# Altium PCB PCB2.PcbDoc
Units mm, origin at the board's own origin, x right, y up, seen from the top; angles counter-clockwise.
Board outline 100.62 x 85.5 mm, 2 copper layers (Top Layer, Bottom Layer); 53 components, 35 nets, 169 pads, 12 vias.
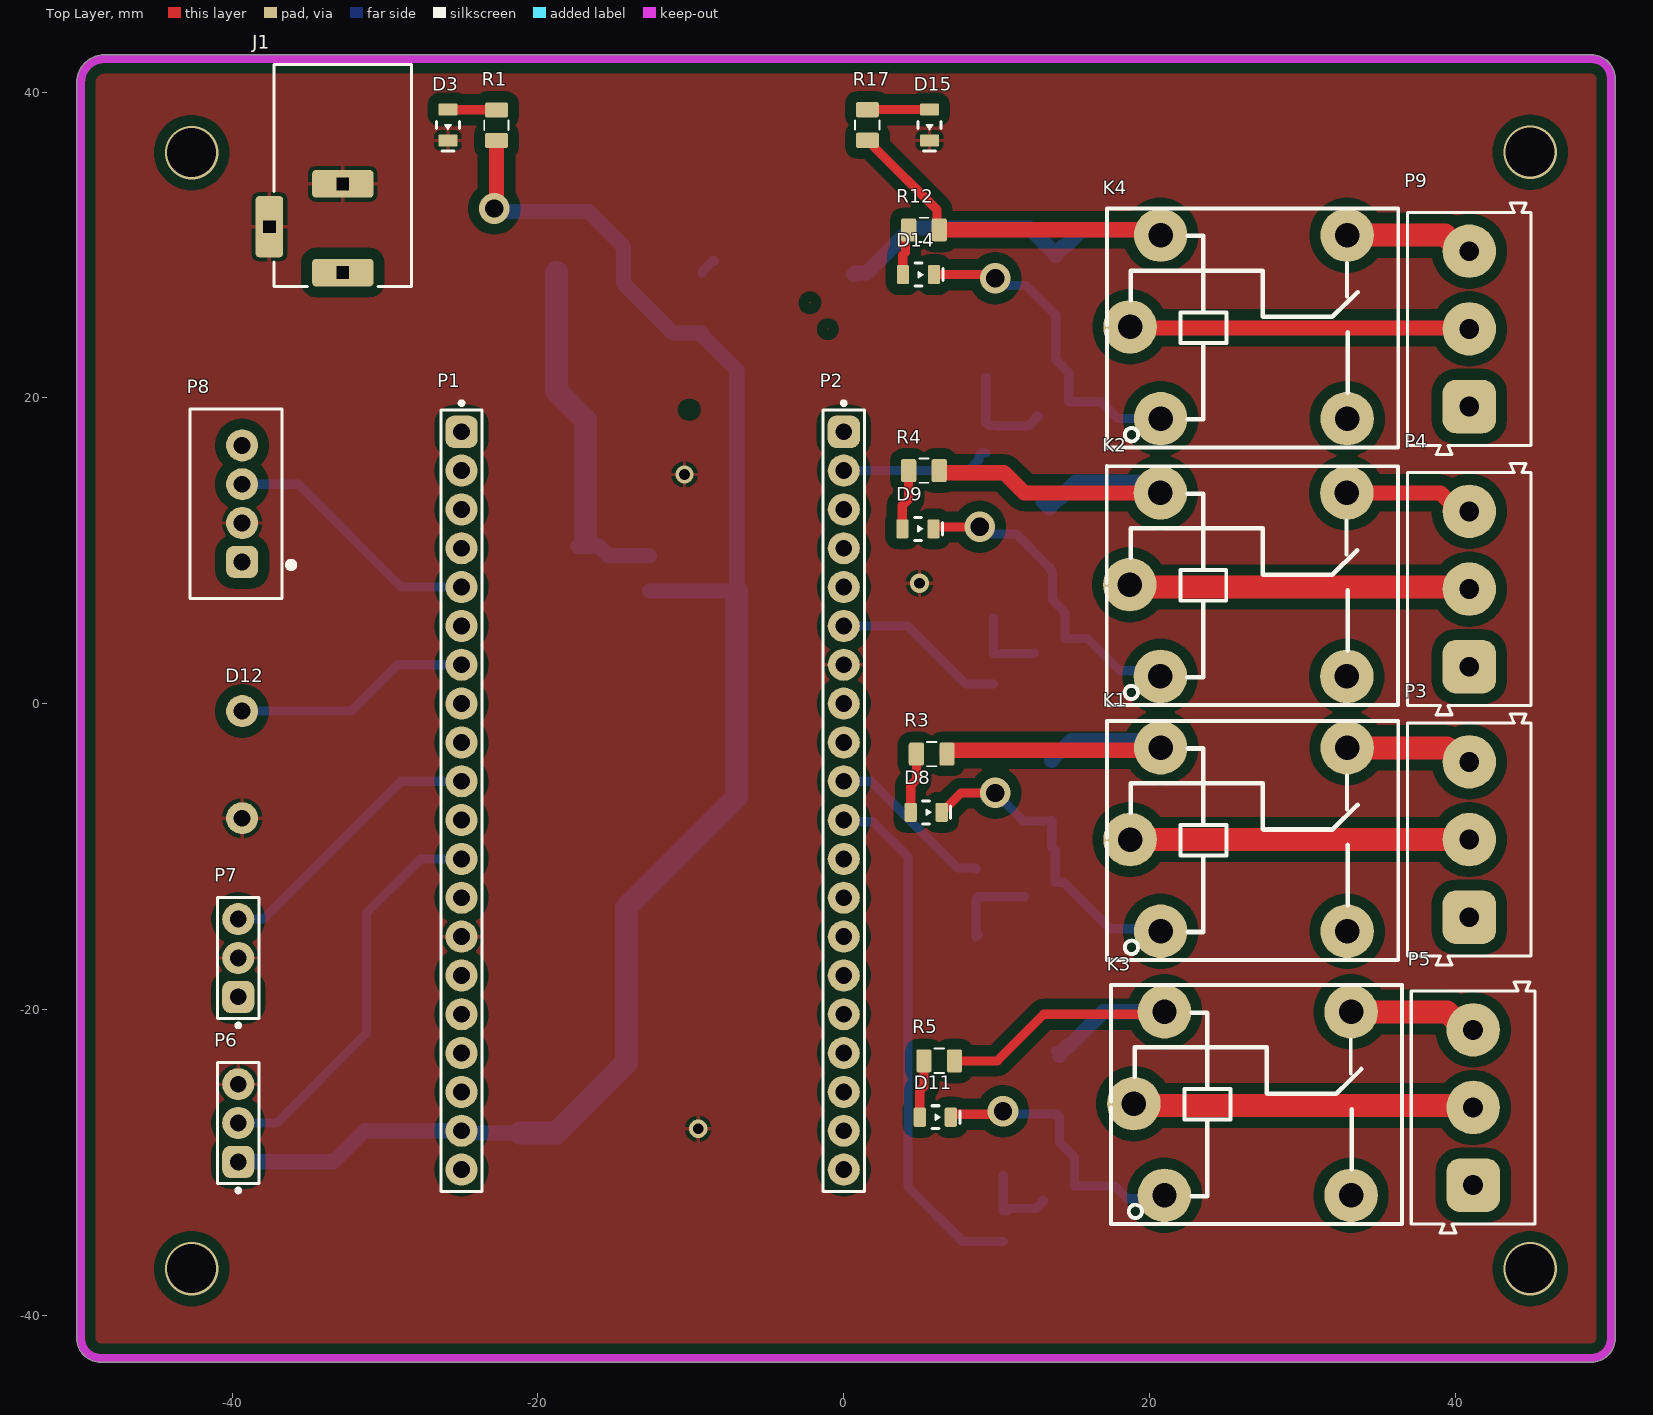
[diagram p0: Top Layer view]
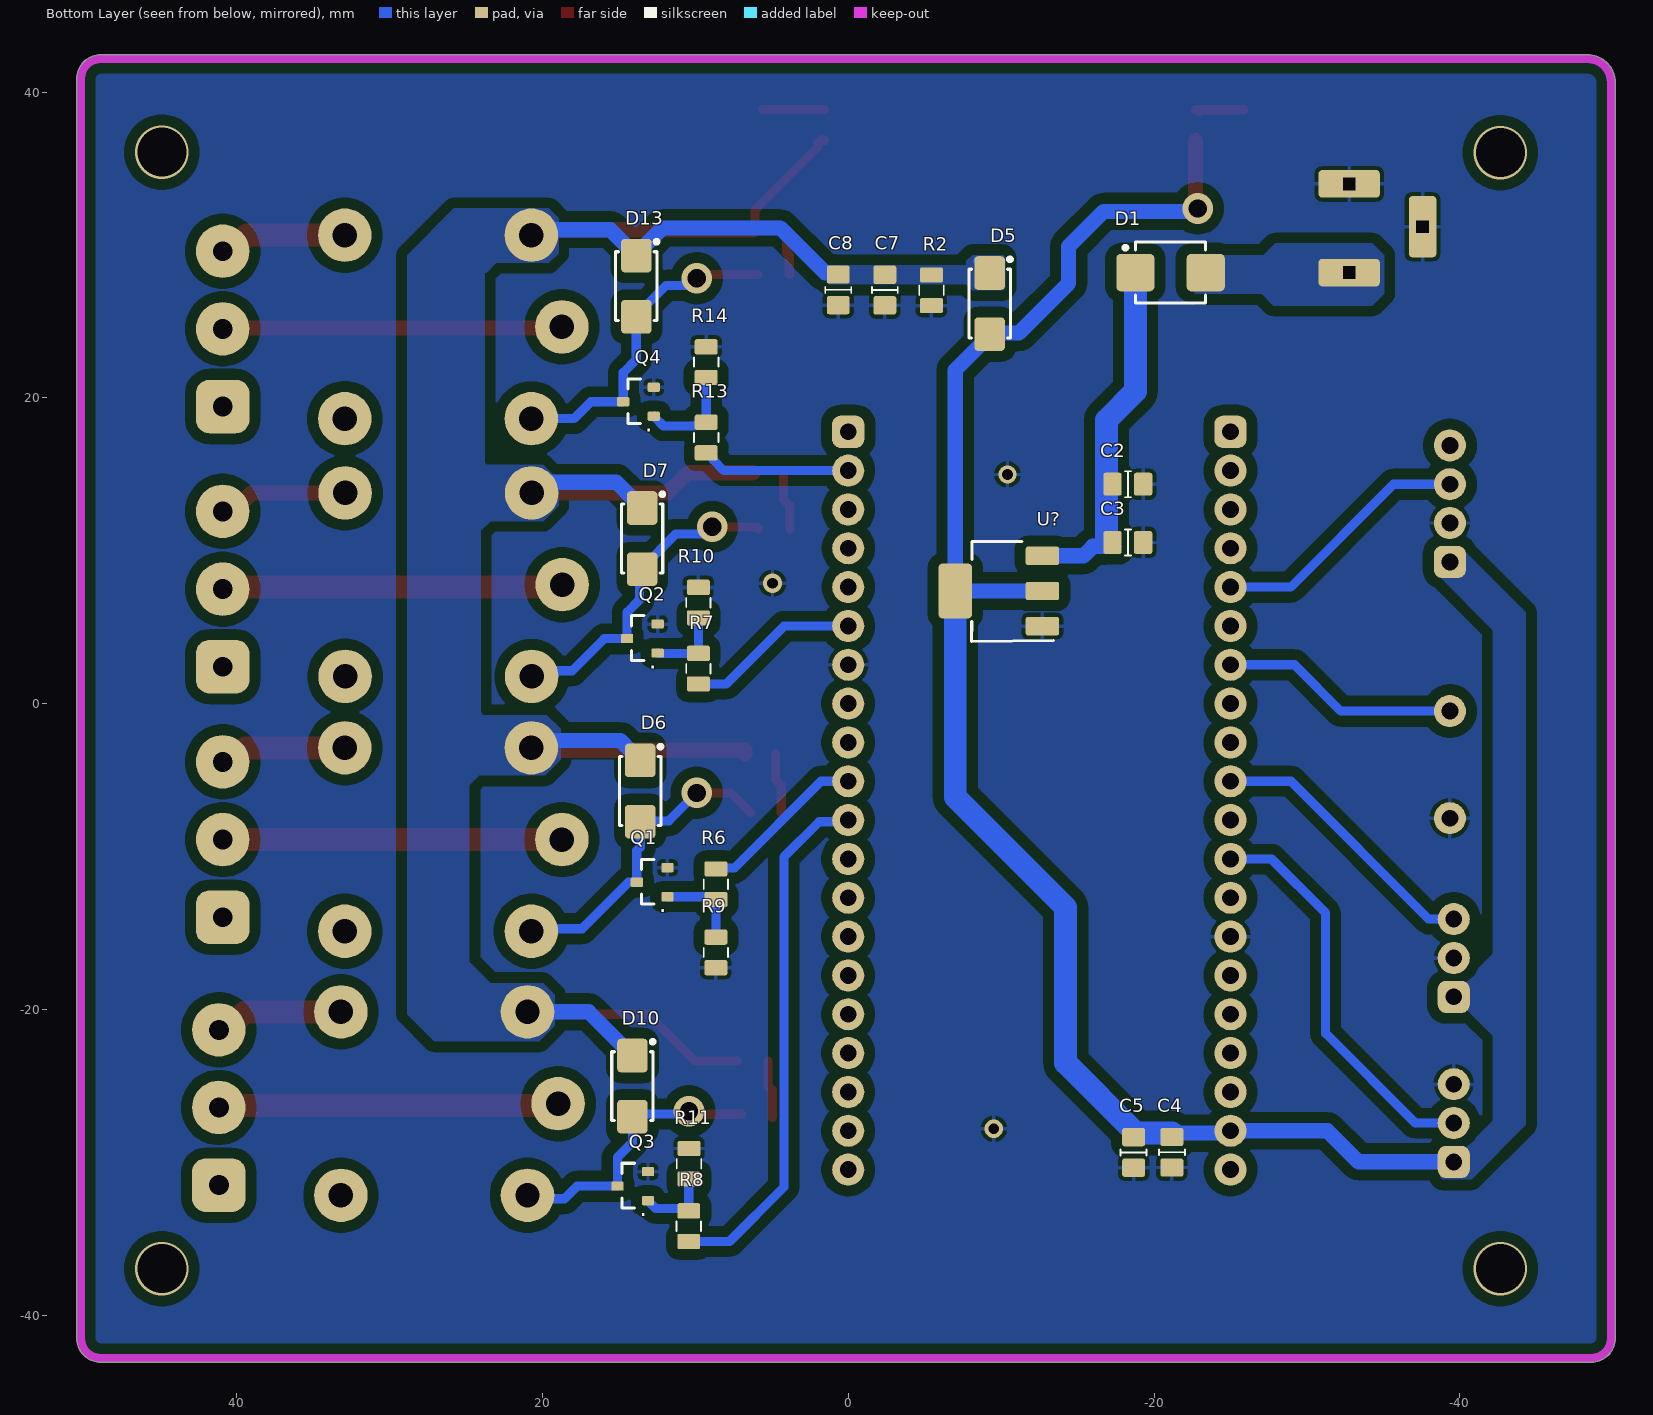
[diagram p1: Bottom Layer view, seen from below]
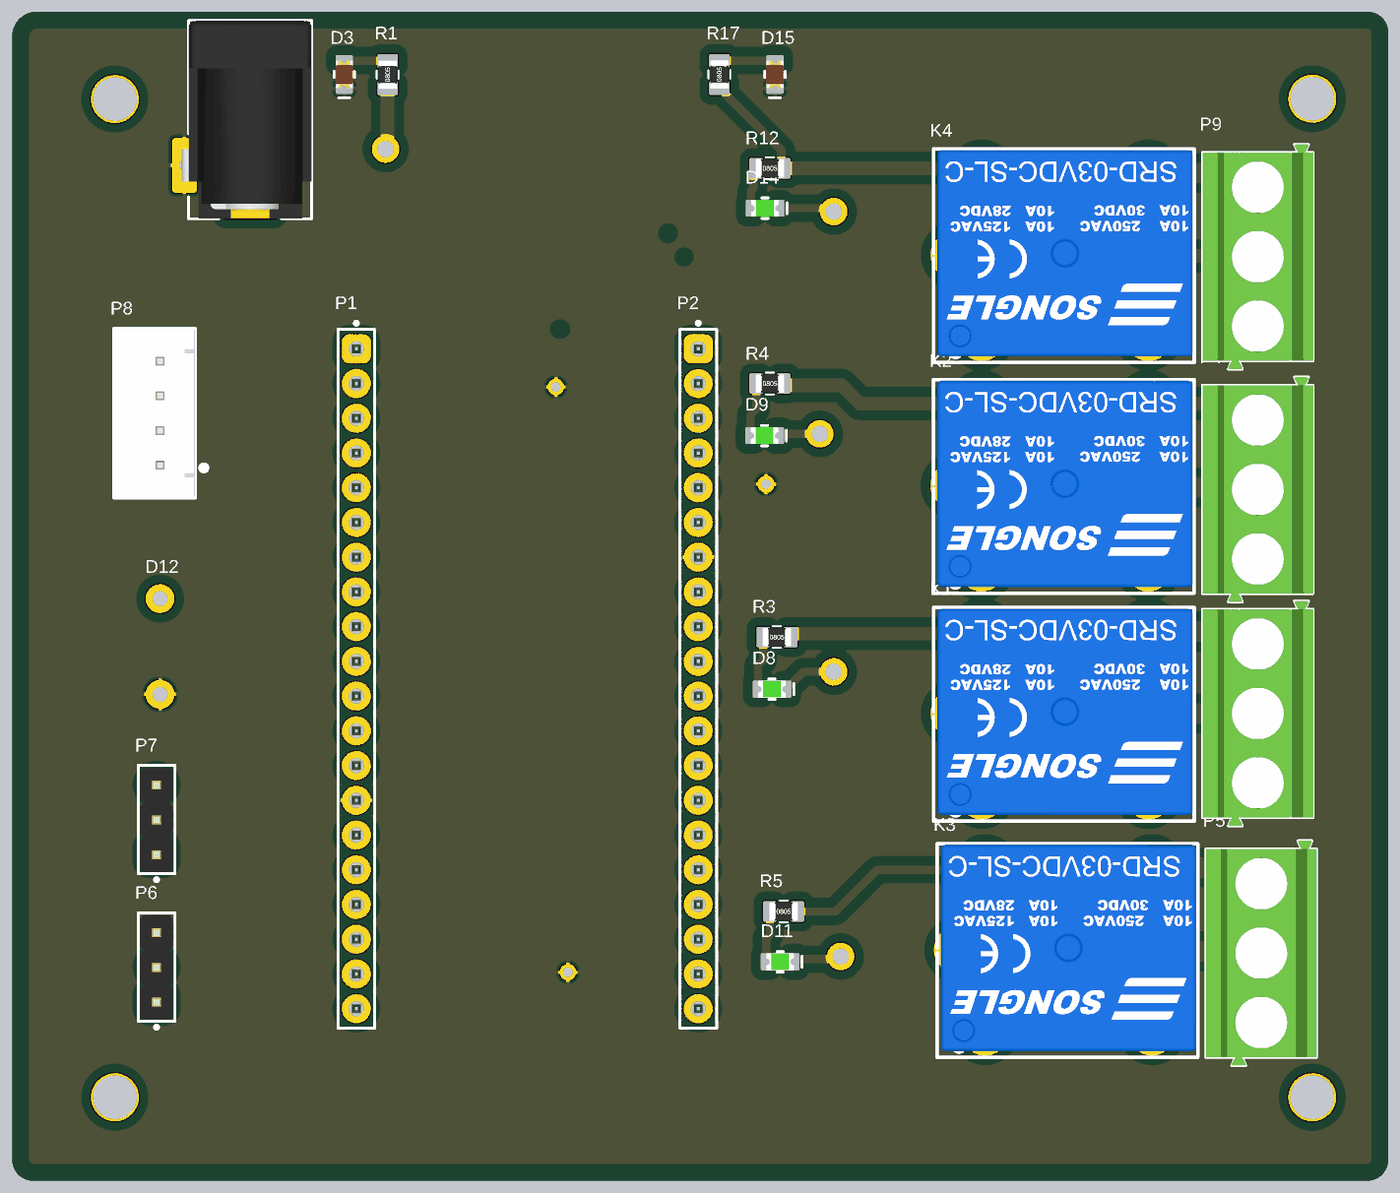
[diagram p2: 3D render of the assembled board from above, using the file's embedded part models]
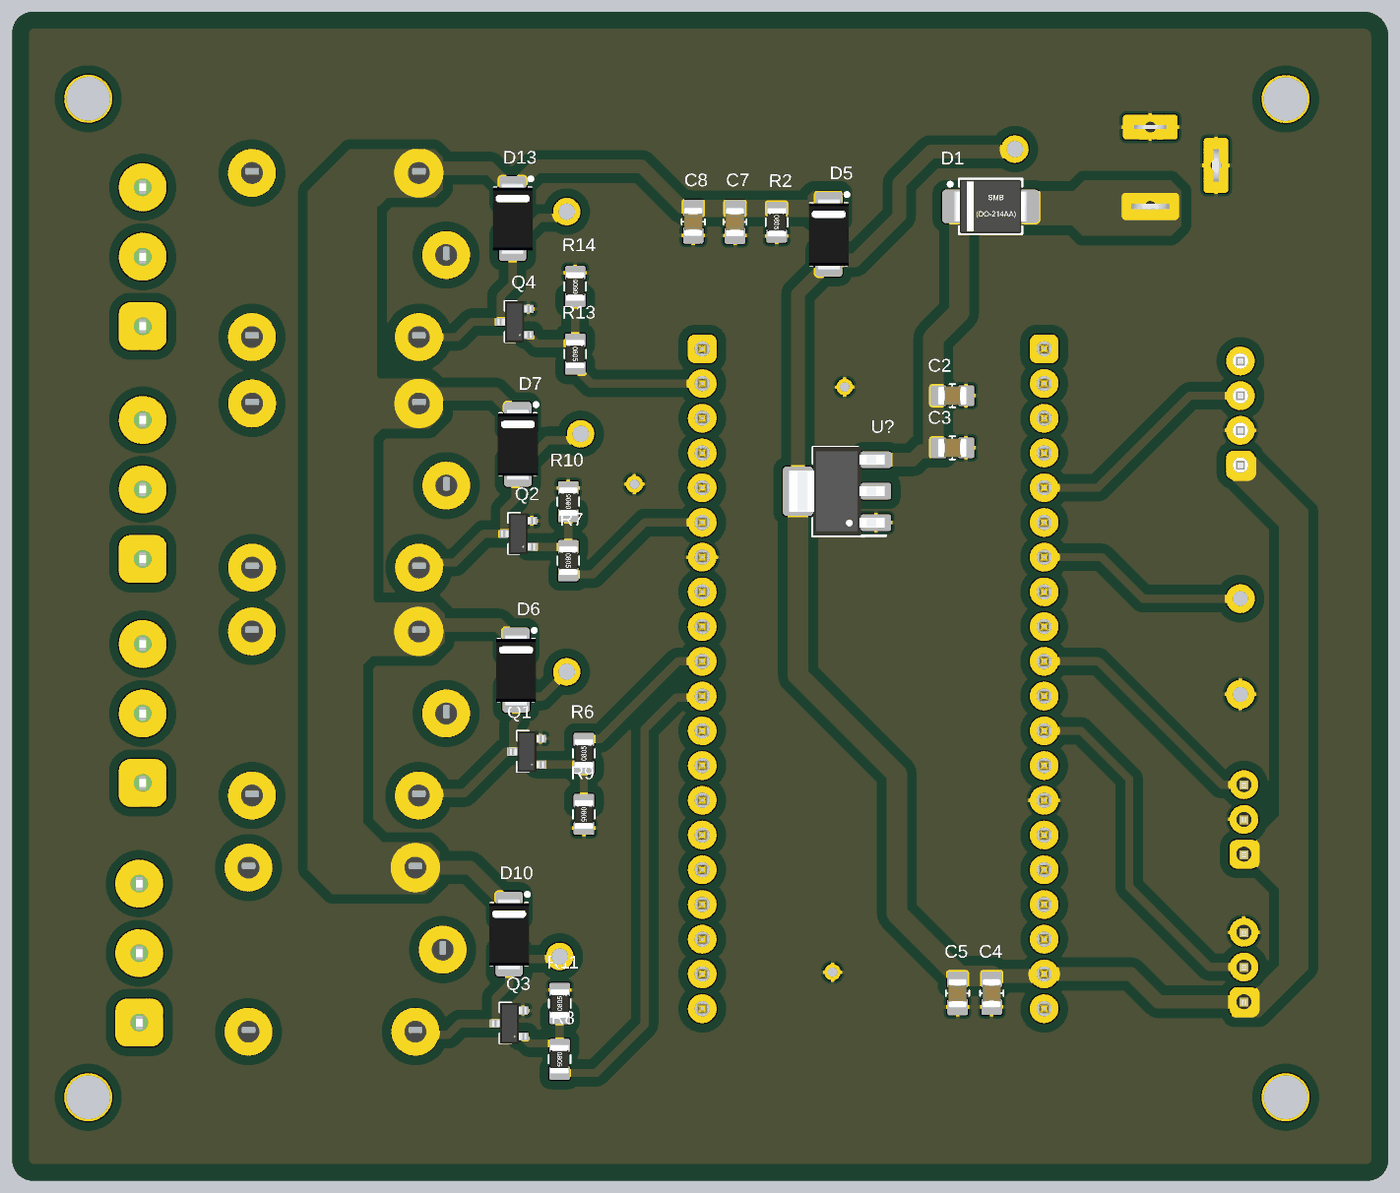
[diagram p3: 3D render of the assembled board from below, using the file's embedded part models]

## Layer stack, top to bottom
Top Solder: solder mask 0.0102, Solder Resist, Dk 3.5
Top Layer: signal copper 0.0356
Dielectric 1: dielectric 0.32, FR-4, Dk 4.8
Bottom Layer: signal copper 0.0356
Bottom Solder: solder mask 0.0102, Solder Resist, Dk 3.5

## Board outline
-50.162,-41.529 ccw(c-48.622,-41.529) -48.624,-43.069 -48.622,-43.069 48.406,-43.069 48.914,-43.069 ccw(c48.914,-41.529) 50.454,-41.529 50.454,-41.465 50.454,40.899 50.454,40.903 ccw(c48.914,40.894) 48.92,42.434 48.919,42.434 -48.368,42.434 ccw(c-48.368,40.64) -50.162,40.64

## Design rules (kind name [scope] priority, off if disabled: settings)
Clearance [All] p1: gap=0.7 ignorepadtopadclearanceinfootprint=FALSE
PolygonConnect [All] p1: connectstyle=Relief reliefconductorwidth=0.254 reliefentries=4 polygonreliefangle="90 Angle" airgapwidth=0.254
RoutingVias [All] p1: holewidth=0.711 width=1.27 viastyle="Through Hole" minholewidth=0.711 minwidth=1.27 maxholewidth=0.711 maxwidth=1.27
SolderMaskExpansion [All] p1: expansion=0.102 istentingtop=FALSE
SupplyNets "Schematic Supply Nets_2" [InNet('+5V')] p1: voltage=0.000
SupplyNets "Schematic Supply Nets_1" [InNet('+5V_A')] p2: voltage=0.000
SupplyNets "Schematic Supply Nets" [InNet('GND')] p3: voltage=0.000
Width [All] p1: maxlimit=1.5 minlimit=0.6 preferedwidth=1
30 further rules are at their usual default settings.

## Components (designator, comment, footprint, x,y, rotation, side; value= is the part's Value field where it differs from the comment)
C2 "100nF" CAP_0805 -18.288,14.351 r0 bottom
C3 "100nF" CAP_0805 -18.288,10.541 r0 bottom
C4 "100nF" CAP_0805 -21.168,-29.345 r90 bottom
C5 "100nF" CAP_0805 -18.669,-29.353 r90 bottom
C7 "100nF" CAP_0805 -2.394,27.051 r90 bottom
C8 "1uF" CAP_0805 0.654,27.067 r90 bottom
D1 "SS36" DIO_SMB -21.082,28.194 r180 bottom
D3 "LED RED" LED_RED_V0805 -25.889,37.846 r270 top
D5 "SS34" DIO_SMA -9.252,26.162 r270 bottom
D6 "SS34" DIO_SMA 13.608,-5.715 r270 bottom
D7 "SS34" DIO_SMA 13.481,10.795 r270 bottom
D8 "GREEN LED" LED_GREEN_V0805 5.392,-7.112 r0 top
D9 "GREEN LED" LED_GREEN_V0805 4.852,11.43 r0 top
D10 "SS34" DIO_SMA 14.116,-25.019 r270 bottom
D11 "GREEN LED" LED_GREEN_V0805 5.988,-27.051 r0 top
D12 "Buzzer" PCBComponent_1 -39.351,-7.493 r90 top
D13 "SS34" DIO_SMA 13.862,27.305 r270 bottom
D14 "GREEN LED" LED_GREEN_V0805 4.884,28.061 r0 top
D15 "LED RED" LED_RED_V0805 5.607,37.846 r270 top
J1 "JACK-Power-DC5.5mm" CON-JACK-PWR-DC550 -32.766,34.544 r180 top
K1 "SRD-03VDC-SL-C" RLY 26.435,-8.89 r0 top
K2 "SRD-03VDC-SL-C" RLY 26.423,7.778 r0 top
K3 "SRD-03VDC-SL-C" RLY 26.689,-26.162 r0 top
K4 "SRD-03VDC-SL-C" RLY 26.435,24.638 r0 top
P1 "ESP32" 61302011121 -25,-6.35 r270 top locked
P2 "ESP32" 61302011121 0,-6.35 r270 top locked
P3 "Terminal Block" CON_03_508_STBRC 40.913,-8.89 r90 top
P4 "Terminal Block" CON_03_508_STBRC 40.913,7.493 r90 top
P5 "Terminal Block" CON_03_508_STBRC 41.167,-26.416 r90 top
P6 "DHT11" "CON -PHD-03254-VSM" -39.605,-27.432 r90 top
P7 "Flame Sensor" "CON -PHD-03254-VSM" -39.605,-16.637 r90 top
P8 "MQ-2" CON_04_254_VSMBHD -39.351,13.071 r90 top
P9 "Terminal Block" CON_03_508_STBRC 40.913,24.511 r90 top
Q1 "BC846x" "BJT_ BC846x" 12.827,-11.684 r0 bottom
Q2 "BC846x" "BJT_ BC846x" 13.465,4.252 r0 bottom
Q3 "BC846x" "BJT_ BC846x" 14.1,-31.562 r0 bottom
Q4 "BC846x" "BJT_ BC846x" 13.719,19.746 r0 bottom
R1 "220" RES_0805 -22.714,37.83 r90 top
R2 "1M" RES_0805 -5.442,27.035 r270 bottom
R3 "220" RES_0805 5.75,-3.302 r0 top
R4 "220" RES_0805 5.242,15.24 r0 top
R5 "220" RES_0805 6.242,-23.368 r0 top
R6 "1k" RES_0805 8.655,-11.811 r90 bottom
R7 "1k" RES_0805 9.798,2.286 r270 bottom
R8 "1k" RES_0805 10.433,-34.179 r270 bottom
R9 "10K" RES_0805 8.655,-16.272 r270 bottom
R10 "10K" RES_0805 9.798,6.604 r90 bottom
R11 "10K" RES_0805 10.414,-30.099 r90 bottom
R12 "220" RES_0805 5.242,30.982 r0 top
R13 "1k" RES_0805 9.29,17.399 r270 bottom
R14 "10K" RES_0805 9.29,22.336 r90 bottom
R17 "220" RES_0805 1.543,37.846 r90 top
U? "?" PWR_LD1117_SOT223 -9.85,7.366 r0 bottom

## Footprints (in the part's own frame and the unit in brackets; to place one, negate y for a bottom-side part, rotate by r counter-clockwise, add the part's x,y. Pads: shape width x height; smd on the part's side, far side on the other; paste and mask are expansions set on the pad)
61302011121 [mm] "Pin Header, pitch 2.54 mm, THT, Vertical, single row, 20p"
  rrect50% 2.1x2.1 hole 1.1: 1(-24.13,0)
  round 2.1 hole 1.1: 2(-21.59,0) 3(-19.05,0) 4(-16.51,0) 5(-13.97,0) 6(-11.43,0) 7(-8.89,0) 8(-6.35,0) 9(-3.81,0) 10(-1.27,0) 11(1.27,0) 12(3.81,0) 13(6.35,0) 14(8.89,0) 15(11.43,0) 16(13.97,0) 17(16.51,0) 18(19.05,0) 19(21.59,0) 20(24.13,0)
  silkscreen extent -26.12,-1.35 25.55,1.35, body extent -25.4,-1.27 25.4,1.27, height 8.57
"BJT_ BC846x" [mm]
  rrect25% 0.8x0.6 smd mask+0.05: 1(-1,0.95) 2(-1,-0.95) 3(1,0)
  silkscreen extent -0.11,-1.5 0.7,1.43, body extent -1.24,-1.5 1.24,1.5, height 1.09
CAP_0805 [mm]
  rrect25% 1.2x1.5 smd: 1(-1,0) 2(1,0)
  silkscreen extent -0.2,-0.85 0.2,0.85, body extent -1.05,-0.67 1.05,0.67, height 0.95
"CON -PHD-03254-VSM" [mm]
  rrect50% 2.1x2.1 hole 1.1: 1(-2.54,0)
  round 2.1 hole 1.1: 2(0,0) 3(2.54,0)
  silkscreen extent -4.53,-1.35 3.96,1.35, body extent -3.85,-1.19 3.77,1.21, height 8.36
CON-JACK-PWR-DC550 [mm]
  rrect25% 4x1.8 hole 0.8 square: 1(0,6.35) 2(0,0.55)
  rrect25% 1.8x4 hole 0.8 square: 3(4.8,3.35)
  silkscreen extent -4.5,-7.25 4.5,7.25, body extent -4.5,-7.25 5,7.25, height 10.75
CON_03_508_STBRC [mm]
  rrect50% 3.5x3.5 hole 1.3: 1(-5.08,0)
  round 3.5 hole 1.3: 2(0,0) 3(5.08,0)
  silkscreen extent -8.22,-4.05 8.22,4.05, body extent -8.22,-4.05 8.22,4.05, height 10.1
CON_04_254_VSMBHD [mm]
  rrect50% 2.1x2.1 hole 1.1: 1(-3.8,0)
  round 2.1 hole 1.1: 2(-1.26,0) 3(1.28,0) 4(3.82,0)
  silkscreen extent -6.2,-3.4 6.2,3.4, body extent -6.15,-2.49 6.15,3.35, height 7.21
DIO_SMA [mm] "Molded Diode, 2-Leads, Body 4.25x2.50mm, IPC Medium Density"
  rrect25% 2.2x2 smd: A(2,0) C(-2,0)
  silkscreen extent -3.02,-1.35 2.25,1.45, body extent -2.61,-1.46 2.67,1.46, height 2.41
DIO_SMB [mm] "Molded Diode, 2-Leads, Body 4.31x3.62mm, IPC Medium Density"
  rrect25% 2.5x2.45 smd: A(2.3,0) C(-2.3,0)
  silkscreen extent -3.08,-2 2.3,2, body extent -2.75,-1.95 2.75,1.95, height 2.45
LED_GREEN_V0805 [mm]
  rrect25% 0.8x1.25 smd paste+0 mask+0: A(-1.016,0) C(1.016,0)
  silkscreen extent -0.23,-0.75 1.6,0.75, body extent -1.01,-0.63 1.01,0.63, height 0.8
LED_RED_V0805 [mm]
  rrect25% 0.8x1.25 smd paste+0 mask+0: A(-1.016,0) C(1.016,0)
  silkscreen extent -0.22,-0.75 1.7,0.75, body extent -1.3,-0.85 1.3,0.85, height 0.25
PCBComponent_1 [mm]
  round 2.1 hole 1.1: 1(0,0) 2(7,0)
PWR_LD1117_SOT223 [mm]
  rrect25% 2.2x1.2 smd: 1(-2.85,2.3) 2(-2.85,0) 3(-2.85,-2.3)
  rrect25% 2.2x3.6 smd: 4(2.85,0)
  silkscreen extent -3.57,-3.22 1.78,3.3, body extent -3.5,-3.25 3.5,3.25, height 1.8
RES_0805 [mm]
  rrect25% 1x1.5 smd: 1(-1,0) 2(1,0)
  silkscreen extent -0.31,-0.8 0.31,0.8, body extent -1.05,-0.67 1.05,0.67, height 0.61
RLY [mm]
  round 3.5 hole 1.6 paste-2539.97 mask+0.05: 1(-5.711,-6) 2(6.489,-6) 3(6.489,6) 4(-5.711,6) 5(-7.711,0)
  silkscreen extent -9.22,-7.87 9.83,7.75, body extent -8.97,-7.42 9.73,7.67, height 14.94

## Part data
C2 C3 C4 C5 C7 C8: library part CAP_0805, "0805 Multilayer Ceramic Capacitors MLCC - SMD/SMT ROHS", JLCPCB Part=?, LCSC Part=?, Mfr. Part=?, Voltage=?
D1: library part DIO_SS36, "60V 3A 700mV@3A SMB Schottky Barrier Diodes", JLCPCB Part=?, LCSC Part=?, Mrf. Part=?
D3 D15: library part LED_RED_V0805, "20mA 615nm~630nm RED", JLCPCB Part=?, LCSC Part=?, Mrf. Part=?
D5 D6 D7 D10 D13: library part DIO_SS34, "40V 500mV@3A 3A SMC (SBD)", JLCPCB Part=?, LCSC Part=?, Mfr. Part=?
D8 D9 D11 D14: library part LED_GREEN_V0805, "20mA 615nm~630nm GREEN", JLCPCB Part=?, LCSC Part=?, Mrf. Part=?
D12: library part Component_1
J1: library part CON-JACK-PWR-DC550, "DC Power Jack Right Angled THT 5.5mmx2.1mm", JLCPCB Part=?, LCSC Part=?, Mrf. Part=?
K1 K2 K3 K4: library part RLY
P1 P2: library part CMP-1502-01102-3, Color=Black, Contact Resistance=20mΩ, Current Rating=3A, Operating Supply Voltage=250V, Connector Type="Male Pin", Contact Material=Copper, Contact Mating Length=5.9944mm, Contact Plating=Gold, Gender=Male, Lead Pitch=2.54mm, Mount="Through Hole", NexarPartId=32855554, Number of Contacts=20, Number of Pins=20, Number of Positions=20, Number of Rows=1, Orientation=Vertical, Packaging=Bulk, Pitch=2.54mm, REACH SVHC=Unknown, RoHS=Compliant, Termination=Solder
P3 P4 P5 P9: library part CON_03_508_STBRC, "5.08 mm Horizontal Entry Modular w. Rising Cage Clamp", JLCPCB Part=?, LCSC Part=?, Mfr. Part=?
P6 P7: library part "CON -PHD-03254-VSM", "3P 2.54mm Vertical Pin Header", JLCPCB Part=?, LCSC Part=?, Mrf. Part=?
P8: library part CON_04_254_VSMBHD, "2.54mm 4P Male Vertical Shrouded Header", JLCPCB Part=?, LCSC Part=?, Mrf. Part=?
Q1 Q2 Q3 Q4: library part "BJT_ BC846x", "Single Bipolar Transistor, NPN, 65 V, 100 mA, 250 mW, SOT23 (TO-236AB), 3 Pins, Surface Mount", JLCPCB Part=?, LCSC Part=?, Mrf. Part=?
R1 R2 R3 R4 R5 R6 R7 R8 R9 R10 R11 R12 R13 R14 R17: library part RES_0805, "0805 Thick Film Resistor - Surface Mount ROHS", JLCPCB Part=?, LCSC Part=?, Mfr. Part=?
U?: library part PWR_LD1117, "Linear Voltage Regulators (LDO)", JLCPCB Part=?, LCSC Part=?, Mrf. Part=?

## Via types
v1: diameter 2, hole 1.2, Top Layer to Bottom Layer, 5 vias
v2: diameter 3.5, hole 3.2, Top Layer to Bottom Layer, 3 vias
v3: diameter 1.2, hole 0.7, Top Layer to Bottom Layer, 2 vias
v4: diameter 3.5/3.5 (per signal layer), hole 3.2, Top Layer to Bottom Layer, 1 vias
v5: diameter 1.27, hole 0.711, Top Layer to Bottom Layer, 1 vias

## Nets (pads, with @x,y where several pads share a name; then routed paths per layer and width w, separated by ;. In a path a pad name is that pad's centre, name@x,y a point inside that pad or via, vN(x,y) a via of type N, cw(c..) or ccw(c..) an arc to the next point about the centre after c; other vN are vias at no path point)
+5V: C4.2 C5.2 D5.A P1.19 P6.1 P7.1 P8.1 R1.1 U?.2 U?.4 | length 108.4
  Top Layer w1: v1(-22.86,32.385) -22.714,32.531 R1.1
  Bottom Layer w1: P6.1 -33.374,-29.972 -31.342,-27.94 P1.19 -24.849,-28.091 C4.2@-21.168,-28.091 ; v1(-22.86,32.385) -22.669,32.194 -16.71,32.194 -14.411,29.894 -14.411,27.492 -11.166,24.247 -9.337,24.247 D5.A -9.252,24.062 -7,21.81 U?.4 U?.2
  Bottom Layer w1.5: C4.2@-21.168,-28.091 -18.82,-28.091 -14.224,-23.495 -14.224,-13.335 -7,-6.111 U?.4
+5V_A: C7.2 C8.2 D5.C D6.C D7.C D10.C D13.C K1.4 K2.4 K3.4 K4.4 R2.1 R3.2 R4.2 R5.2 R12.2 R17.1 | length 116.6
  Top Layer w0.6: R17.1 1.793,36.846 1.993,36.646 1.993,36.396 6.096,32.293 6.096,31.128 R12.2 ; R5.2@7.239,-23.368 10.036,-23.368 13.084,-20.32 20.82,-20.32 K3.4
  Top Layer w1: R4.2@6.242,15.109 10.483,15.109 11.814,13.778 K2.4 ; R12.2@6.242,30.992 20.37,30.992 K4.4 ; R3.2 6.75,-3.052 K1.4@20.562,-3.052 ; K1.4@20.724,-3.052 K1.4@20.562,-3.052 ; K1.4 K1.4@20.562,-3.052
  Bottom Layer w0.6: D5.C -9.252,28.262 -8.552,28.962 D5.C@-8.452,28.962 ; D10.C@13.831,-22.734 D10.C
  Bottom Layer w1: C8.2 0.754,28.167 1.497,28.167 4.445,31.115 12.152,31.115 D13.C@13.862,29.405 ; D7.C@13.031,13.245 D7.C 13.481,12.895 13.981,13.395 14.081,13.395 15.164,14.478 19.336,14.478 20.036,13.778 K2.4 ; D6.C 13.608,-3.615 14.108,-3.115 14.208,-3.115 14.91,-2.413 20.247,-2.413 K1.4 ; D13.C D13.C@13.862,29.405 ; D10.C 14.116,-22.919 14.616,-22.419 14.716,-22.419 16.973,-20.162 K3.4 ; K4.4 20.374,30.988 15.545,30.988 14.462,29.905 14.362,29.905 D13.C@13.862,29.405
GND: C2.1 C3.1 C4.1 C5.1 C7.1 C8.1 D3.C D12.1 D15.C J1.2 J1.3 P1.14 P2.7 P6.3 P7.2 P8.2 Q1.2 Q2.2 Q3.2 Q4.2 R2.2 R9.2 R10.2 R11.2 R14.2 U?.1
  other v3: -9.525,-27.813 -10.414,14.986
  other v5: 4.953,7.874
IO_5: P2.10 R6.2 | length 11
  Bottom Layer w0.6: P2.10 1.778,-5.08 7.457,-10.759 8.603,-10.759 R6.2
IO_14: P1.12 P6.2 | length 26.4
  Bottom Layer w0.6: P6.2 -37.084,-27.432 -31.223,-21.571 -31.223,-13.697 -27.686,-10.16 P1.12
IO_17: P2.11 R8.2 | length 34.5
  Bottom Layer w0.6: P2.11 0.103,-7.723 1.9,-7.723 4.21,-10.033 4.21,-31.623 7.766,-35.179 R8.2
IO_21: P2.6 R7.2 | length 11.4
  Bottom Layer w0.6: P2.6 4.191,5.08 7.985,1.286 R7.2
IO_23: P2.2 R13.2 | length 10.2
  Bottom Layer w0.6: P2.2@-0.302,15.24 8.131,15.24 8.84,15.949 8.84,16.199 9.04,16.399 R13.2
IO_26: P1.10 P7.3 | length 18.3
  Bottom Layer w0.6: P7.3 -37.973,-14.097 -28.956,-5.08 P1.10
IO_32: D12.2 P1.7 | length 15.6
  Bottom Layer w0.6: D12.2 -32.224,-0.493 -29.191,2.54 P1.7
IO_34: P1.5 P8.3 | length 17.1
  Bottom Layer w0.6: P8.3 -35.668,14.351 -28.937,7.62 P1.5
NetC2_2: C2.2 C3.2 D1.C U?.3 | length 23.4
  Bottom Layer w1: C3.2@-17.388,10.291 -16.606,10.291 -16.602,10.287 -16.002,10.287 -15.381,9.666 U?.3
  Bottom Layer w1.5: D1.C -18.782,20.433 -16.891,18.542 -16.891,14.351 -16.891,12.319 C3.2@-16.891,10.541
NetD1_A: D1.A J1.1
NetD3_A: D3.A R1.2 | length 3.2
  Top Layer w0.6: D3.A@-25.873,38.846 R1.2@-22.73,38.846 ; R1.2@-22.968,38.735 R1.2@-22.952,38.719
NetD6_A: D6.A D8.C K1.1 Q1.3 | length 20.8
  Top Layer w0.6: D8.C 7.678,-5.842 v1(9.906,-5.842)
  Bottom Layer w0.6: v1(9.906,-5.842) 11.732,-7.668 13.555,-7.668 13.608,-7.615 D6.A 13.608,-9.398 13.827,-9.617 Q1.3 ; Q1.3@13.927,-11.684 14.37,-11.684 17.41,-14.724 20.558,-14.724 K1.1
NetD7_A: D7.A D9.C K2.1 Q2.3 | length 21.1
  Top Layer w0.6: D9.C 5.868,11.457 5.968,11.557 v1(8.89,11.557)
  Bottom Layer w0.6: v1(8.89,11.557) 9.349,11.098 11.278,11.098 13.481,8.895 D7.A 13.651,8.625 13.651,6.795 14.465,5.981 Q2.3 15.96,4.252 18.062,2.15 20.34,2.15 K2.1
NetD8_A: D8.A R3.1 | length 4
  Top Layer w0.6: D8.A 4.376,-5.356 4.75,-4.983 R3.1
NetD9_A: D9.A R4.1 | length 4
  Top Layer w0.6: D9.A 3.829,11.437 3.829,12.954 4.242,13.367 R4.1
NetD10_A: D10.A D11.C K3.1 Q3.3 | length 18.6
  Top Layer w0.6: D11.C@6.985,-26.845 6.996,-26.856 10.219,-26.856 v1(10.414,-26.661)
  Bottom Layer w0.6: v1(10.414,-26.661) 10.593,-26.84 13.937,-26.84 D10.A 14.116,-28.702 15.1,-29.686 Q3.3 17.738,-31.562 18.561,-32.385 20.755,-32.385 K3.1
NetD11_A: D11.A R5.1 | length 3.8
  Top Layer w0.6: D11.A 4.972,-25.307 5.242,-25.037 R5.1
NetD13_A: D13.A D14.C K4.1 Q4.3 | length 21.5
  Top Layer w0.6: D14.C 9.659,28.061 v1(9.906,27.814)
  Bottom Layer w0.6: v1(9.906,27.814) 10.365,27.355 11.912,27.355 13.862,25.405 13.862,22.504 14.719,21.647 Q4.3 16.825,19.746 17.933,18.638 K4.1
NetD14_A: D14.A R12.1 | length 3.1
  Top Layer w0.6: D14.A 3.861,28.068 3.861,29.331 4.042,29.512 4.042,30.782 R12.1
NetD15_A: D15.A R17.2 | length 4
  Top Layer w0.6: R17.2@1.551,38.854 D15.A@5.599,38.854
NetK1_3: K1.3 P3.3 | length 8.4
  Top Layer w1.5: K1.3 39.452,-2.89 40.372,-3.81 P3.3
NetK1_5: K1.5 P3.2 | length 22.2
  Top Layer w1.5: K1.5 P3.2
NetK2_3: K2.3 P4.3 | length 8.5
  Top Layer w1: K2.3 39.032,13.778 40.237,12.573 P4.3
NetK2_5: K2.5 P4.2 | length 22.3
  Top Layer w1.5: K2.5 18.854,7.635 40.771,7.635 P4.2
NetK3_3: K3.3 P5.3 | length 8.5
  Top Layer w1.5: K3.3 39.452,-20.162 40.626,-21.336 P5.3
NetK3_5: K3.5 P5.2 | length 22.3
  Top Layer w1.5: K3.5 19.105,-26.289 41.04,-26.289 P5.2
NetK4_3: K4.3 P9.3 | length 8.4
  Top Layer w1.5: K4.3 39.325,30.638 40.372,29.591 P9.3
NetK4_5: K4.5 P9.2 | length 22.2
  Top Layer w1: K4.5 18.788,24.575 40.849,24.575 P9.2
NetQ1_1: Q1.1 R6.1 R9.1 | length 5.9
  Bottom Layer w0.6: R6.1 R9.1 R9.1@8.819,-15.108 ; R6.1 8.832,-12.634 Q1.1
NetQ2_1: Q2.1 R7.1 R10.1 | length 5
  Bottom Layer w0.6: R7.1 12.349,3.286 12.365,3.302 Q2.1 ; R7.1 R10.1
NetQ3_1: Q3.1 R8.1 R11.1 | length 5.1
  Bottom Layer w0.6: R8.1 R11.1@10.433,-30.861 ; R8.1@10.683,-33.179 10.842,-33.02 12.592,-33.02 13,-32.612 13,-32.512 Q3.1
NetQ4_1: Q4.1 R13.1 R14.1 | length 6.8
  Bottom Layer w0.6: R14.1 R13.1 9.49,18.199 10.053,18.199 10.092,18.161 12.084,18.161 12.619,18.696 12.619,18.796 Q4.1
pads on no net: K1.2 K2.2 K3.2 K4.2 P1.1 P1.2 P1.3 P1.4 P1.6 P1.8 P1.9 P1.11 P1.13 P1.15 P1.16 P1.17 P1.18 P1.20 P2.1 P2.3 P2.4 P2.5 P2.8 P2.9 P2.12 P2.13 P2.14 P2.15 P2.16 P2.17 P2.18 P2.19 P2.20 P3.1 P4.1 P5.1 P8.4 P9.1
copper on no net:
  other v2: -42.653,-36.957 44.896,-36.957 44.896,36.068
  other v4: -42.653,36.043

## Polygon pours and split planes (outlines as drawn)
GND on Bottom Layer "GND_L02_P013" (solid, pour order 13): 48.768,42.291 50.292,40.767 50.292,-41.783 49.149,-42.926 49.022,-42.799 -48.895,-42.799 -49.911,-41.783 -49.911,41.148 -48.895,42.164
+5V on Bottom Layer "+5V_L02_P006" (solid, pour order 6): -40.132,10.16 -44.323,5.969 -44.323,-27.559 -40.767,-31.115 -38.843,-31.115 -38.716,-30.988 -38.716,-29.083 -38.843,-28.956 -40.494,-28.956 -42.164,-27.286 -42.164,-21.736 -40.367,-19.939 -38.97,-19.939 -38.716,-19.685 -38.716,-18.542 -38.97,-18.288 -40.24,-18.288 -42.164,-16.364 -42.164,4.807 -38.589,8.382 -38.462,8.509 -38.462,10.033 -38.589,10.16
+5V_A on Bottom Layer "+5V_A_L02_P005" (solid, pour order 5): 25.8,32.385 28.848,29.337 28.848,-20.32 27.07,-22.098 20.212,-22.098 19.196,-21.082 19.196,-19.05 19.958,-18.288 23.387,-18.288 24.784,-16.891 24.784,-5.334 24.149,-4.699 19.831,-4.699 18.815,-3.683 18.815,-1.651 19.704,-0.762 23.917,-0.762 24.022,-0.508 24.022,11.303 23.387,11.938 19.958,11.938 18.942,12.954 18.942,14.605 19.958,15.621 23.641,15.621 23.768,15.748 23.768,16.51 23.768,28.194 23.641,28.194 23.006,28.829 19.577,28.829 18.942,29.464 18.942,31.75 19.577,32.385 20.974,32.385
+5V_A on Bottom Layer "+5V_A_L02_P004" (solid, pour order 4): -9.887,29.337 -10.141,29.337 -10.268,29.21 -10.268,27.178 -10.141,27.051 -8.109,27.051 -7.728,27.432 1.289,27.432 1.416,27.559 1.416,28.575 1.289,28.702 1.244,28.657 -7.683,28.657 -7.728,28.702 -7.728,28.956 -8.109,29.337
NetD1_A on Bottom Layer "NETD1_A_L02_P000" (solid, pour order 0): -22.333,29.337 -27.159,29.337 -27.921,30.099 -34.29,30.099 -35.052,29.337 -35.052,26.797 -34.29,26.035 -27.794,26.035 -27.032,26.797 -22.333,26.797 -22.079,27.051 -22.079,29.083
GND on Top Layer "GND_L01_P014" (solid, pour order 14): 48.832,41.91 50.356,40.386 50.356,-42.164 49.213,-43.307 49.086,-43.18 -48.831,-43.18 -49.847,-42.164 -49.847,40.767 -48.831,41.783

## Keep-outs
Keep-Out Layer:
  lines w0.54: -49.892,-40.894 -49.892,40.64 cw(c-48.368,40.64) -48.368,42.164 ; -49.892,-40.513 -49.892,-41.529 ccw(c-48.622,-41.529) -48.622,-42.799 48.406,-42.799 ; -46.209,42.164 -48.368,42.164 ; 46.882,-42.799 48.914,-42.799 ccw(c48.914,-41.529) 50.184,-41.529 ; 47.136,42.164 48.914,42.164 cw(c48.914,40.894) 50.184,40.894 ; 48.919,42.164 -48.368,42.164 ; 50.184,-41.465 50.184,40.899

## Other copper
Top Layer:
  region: -10.066,19.232 -10.066,19.205 -10.146,19.205 -10.146,19.232 -10.093,19.232
  region: -2.24,26.23 -2.213,26.23 -2.213,26.257 -2.187,26.257 -2.187,26.203 -2.213,26.203 -2.213,26.177 -2.24,26.177 -2.24,26.203
  region: -1.041,24.503 -1.03,24.503 -1.03,24.492 -1.041,24.492